# EAGLE board landshark-handheld-controller (EAGLE 6.6.0)
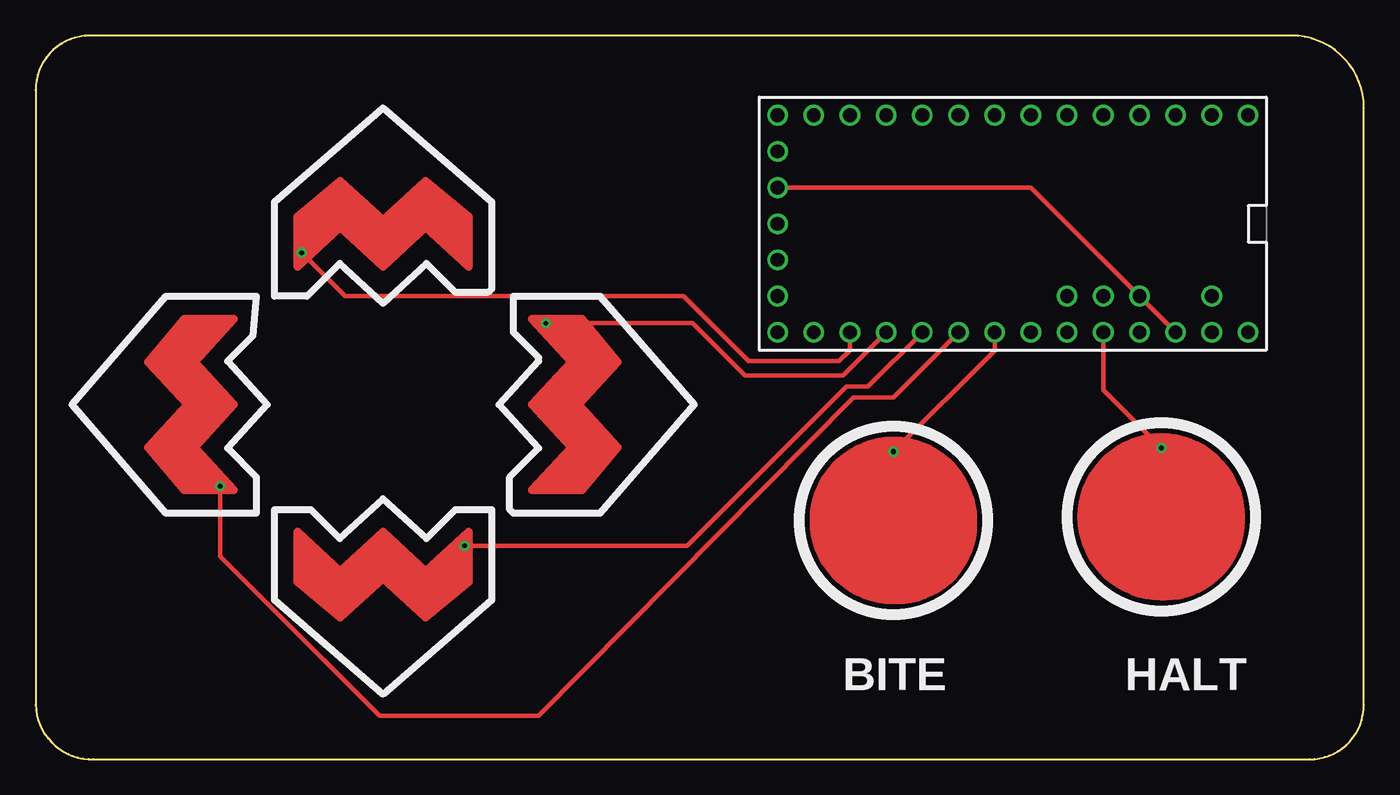
[diagram p0: board, top side]
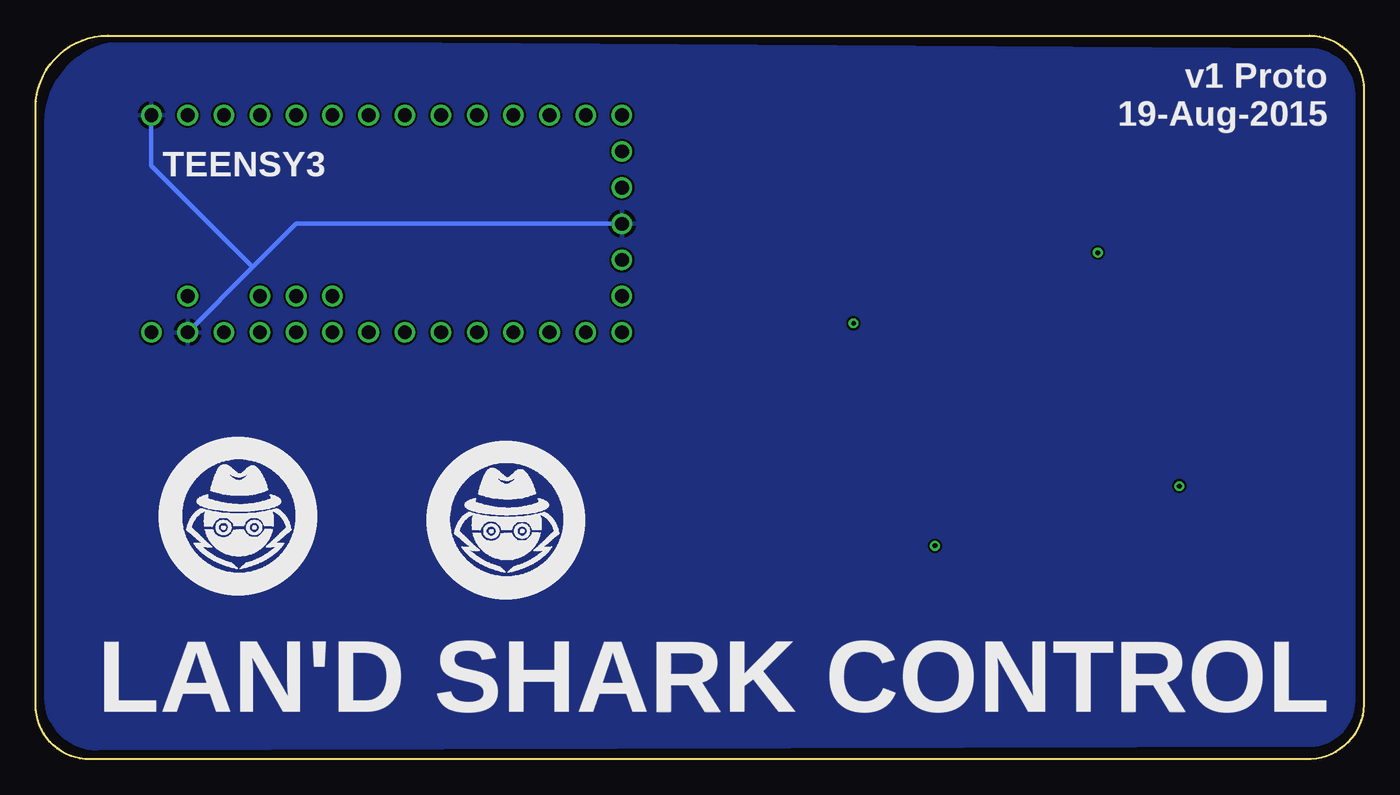
[diagram p1: board, bottom side, seen from below]

Size 93.22 x 50.8 mm. Coordinates in mm from the lower left corner, seen from the top.
Outline: 0,46.99 0,3.81 arc90 4.06,0 89.41,0 arc90 93.22,3.81 93.22,45.72 arc90 88.14,50.8 3.81,50.8 arc90 0,46.99
Copper layers (1*16): Top 0.0356mm / dielectric 1.5011mm / Bottom 0.0356mm
Design rules "LaenPCBOrder": minimum track width 6mil, minimum drill 13mil, track to track 6mil, track to pad 6mil, pad to pad 6mil, via to via 6mil, smd to smd 6mil, copper to edge 15mil, drill to drill 6mil, minimum pad ring 7mil, minimum via ring 7mil, stop-mask expansion 3mil, vias tented up to drill 0mil, thermal gap 10mil

## Footprints (pad centres in the part's own frame; a part is rotated, then mirrored left to right if it is on the bottom)
BUTTON_PASSIVE_12MM = drill 0.356: BUTTON 0,4.826
SLIDER_PASSIVE_1SEG_12MM = drill 0.33: P$1 -5.715,-2.54
TEENSY_3.0+4 = drill 0.965: 0 -7.62,13.97; 1 -7.62,11.43; 2 -7.62,8.89; 3 -7.62,6.35; 3.3V 7.62,11.43; 3.3V1 -2.54,-16.51; 4 -7.62,3.81; 5 -7.62,1.27; 6 -7.62,-1.27; 7 -7.62,-3.81; 8 -7.62,-6.35; 9 -7.62,-8.89; 10 -7.62,-11.43; 11 -7.62,-13.97; 12 -7.62,-16.51; 13 7.62,-16.51; 14/A0 7.62,-13.97; 15/A1 7.62,-11.43; 16/A2 7.62,-8.89; 17/A3 7.62,-6.35; 18/A4 7.62,-3.81; 19/A5 7.62,-1.27; 20/A6 7.62,1.27; 21/A7 7.62,3.81; 22/A8 7.62,6.35; 23/A9 7.62,8.89; A10 5.08,6.35; A11 5.08,3.81; AGND 7.62,13.97; AREF 5.08,8.89; GND -7.62,16.51; GND1 0,-16.51; PGM 2.54,-16.51; RESET 5.08,-16.51; VBAT -5.08,-16.51; VIN 7.62,16.51; VUSB 5.08,13.97

## Placement (x,y rotation side)
BITE  [BUTTON_PASSIVE_12MM]  60.2,16.76 0 top
BOTTOM  SLIDER_PASSIVE_1SEG  [SLIDER_PASSIVE_1SEG_12MM]  24.38,12.45 180 top
HALT  [BUTTON_PASSIVE_12MM]  78.99,17.02 0 top
LEFT  SLIDER_PASSIVE_1SEG  [SLIDER_PASSIVE_1SEG_12MM]  10.41,24.89 90 top
RIGHT  SLIDER_PASSIVE_1SEG  [SLIDER_PASSIVE_1SEG_12MM]  38.35,24.89 270 top
TEENSY3  [TEENSY_3.0+4]  68.58,37.59 270 top
TOP  SLIDER_PASSIVE_1SEG  [SLIDER_PASSIVE_1SEG_12MM]  24.38,38.1 0 top

## Library data of the parts
BITE BOTTOM HALT LEFT RIGHT TOP = PatternAgents-TouchWidgets
TEENSY3 = Teensy3.0

## Nets
3.3V: TEENSY3.3.3V TEENSY3.3.3V1 TEENSY3.AREF
BITE: BITE.BUTTON TEENSY3.19/A5
BOTTOM: BOTTOM.P$1 TEENSY3.17/A3
GND: TEENSY3.AGND TEENSY3.GND TEENSY3.GND1
HALT: HALT.BUTTON TEENSY3.22/A8
LEFT: LEFT.P$1 TEENSY3.18/A4
RIGHT: RIGHT.P$1 TEENSY3.16/A2
TOP: TEENSY3.15/A1 TOP.P$1
VBAT: TEENSY3.VBAT
VIN: TEENSY3.VIN
VUSB: TEENSY3.VUSB

## Tracks (layer width: path | path; a pad name or v marks a point on that pad's centre or on a via)
3.3V
  Top 0.33: TEENSY3.3.3V1 69.85,40.13 TEENSY3.AREF TEENSY3.3.3V
BITE
  Top 0.33: TEENSY3.19/A5 67.31,28.7 BITE.BUTTON
BOTTOM
  Top 0.33: BOTTOM.P$1 45.72,14.99 56.9,26.16 58.42,26.16 TEENSY3.17/A3
GND
  Bottom 0.33: TEENSY3.GND1 74.93,37.59 77.98,34.54 | 77.98,34.54 TEENSY3.AGND | TEENSY3.GND 85.09,41.66 77.98,34.54
  pour Bottom: 0.76,4.06 arc90 3.81,1.02 88.9,0.76 arc90 92.46,4.32 92.46,44.7 arc90 86.87,50.29 3.81,49.78 arc90 0.76,46.74
HALT
  Top 0.33: TEENSY3.22/A8 74.93,25.91 HALT.BUTTON
LEFT
  Top 0.33: LEFT.P$1 12.95,14.22 24.13,3.05 35.31,3.05 57.4,25.4 60.2,25.4 TEENSY3.18/A4
RIGHT
  Top 0.33: RIGHT.P$1 46.1,30.61 49.78,26.92 56.64,26.92 TEENSY3.16/A2
TOP
  Top 0.33: TEENSY3.15/A1 57.15,28.7 56.39,27.94 50.04,27.94 45.47,32.51 21.72,32.51 TOP.P$1

## Text on the board
bPlace: v1 Proto / 19-Aug-2015 | LAN'D SHARK CONTROL